# Altium PCB OPAMP_TESTERh.PcbDoc (part 1 of 2)
Units mm, origin at the board's own origin, x right, y up, seen from the top; angles counter-clockwise.
Board outline 262.64 x 156.72 mm, 2 copper layers (Top Layer, Bottom Layer); 210 components, 0 nets, 1610 pads, 0 vias.
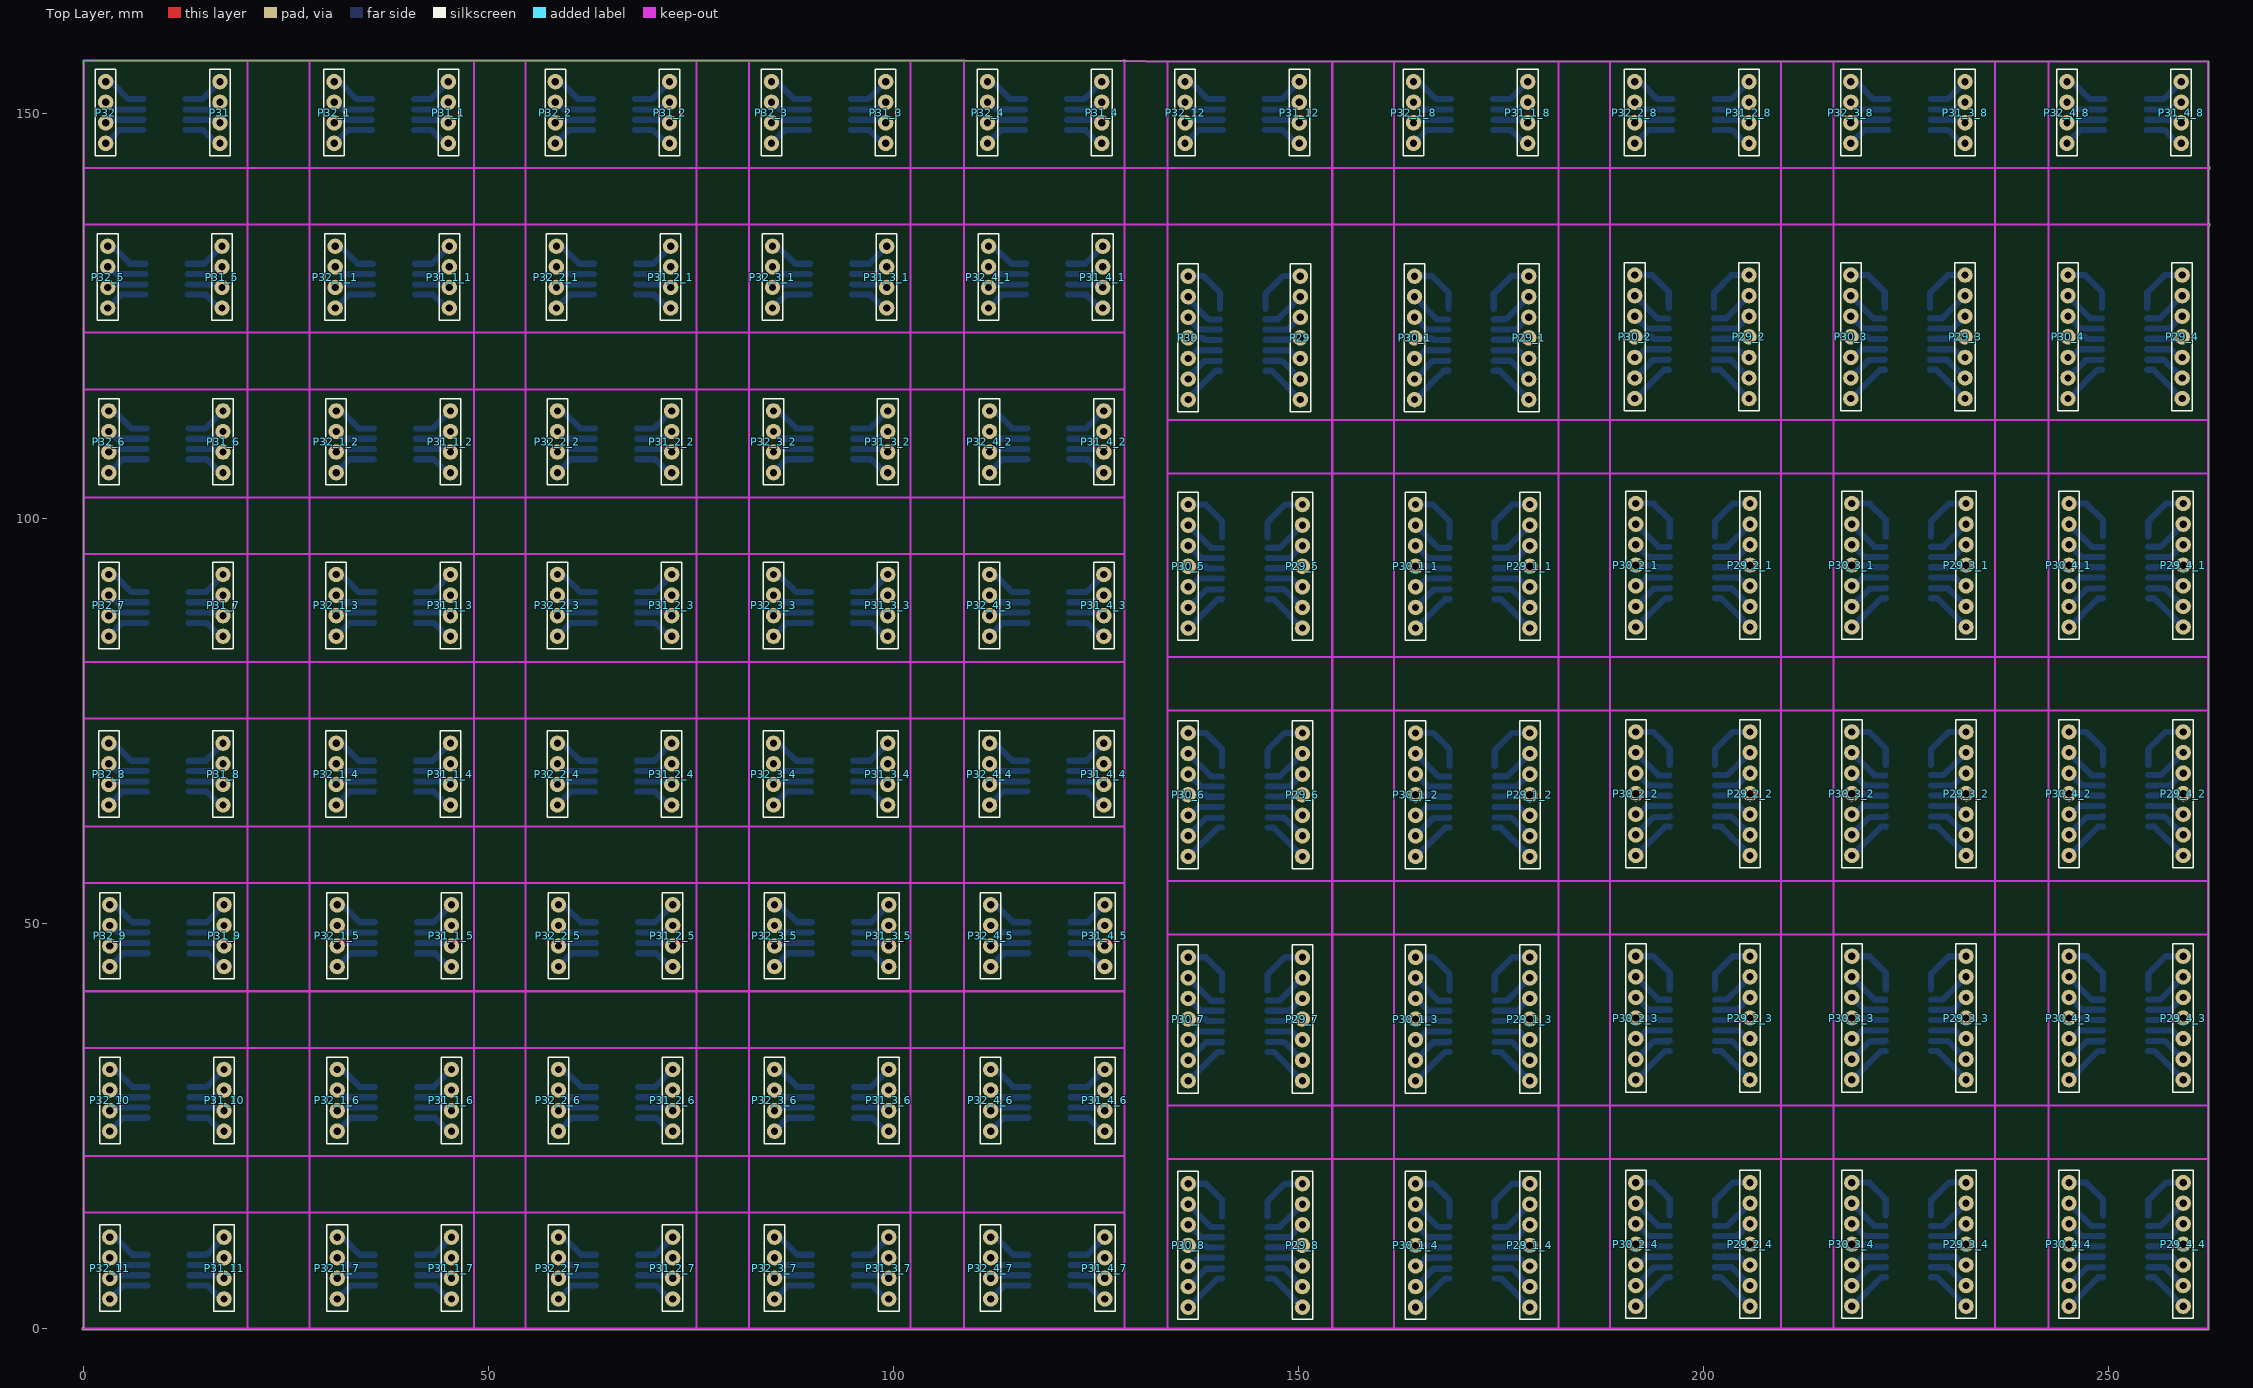
[diagram p0: Top Layer view]
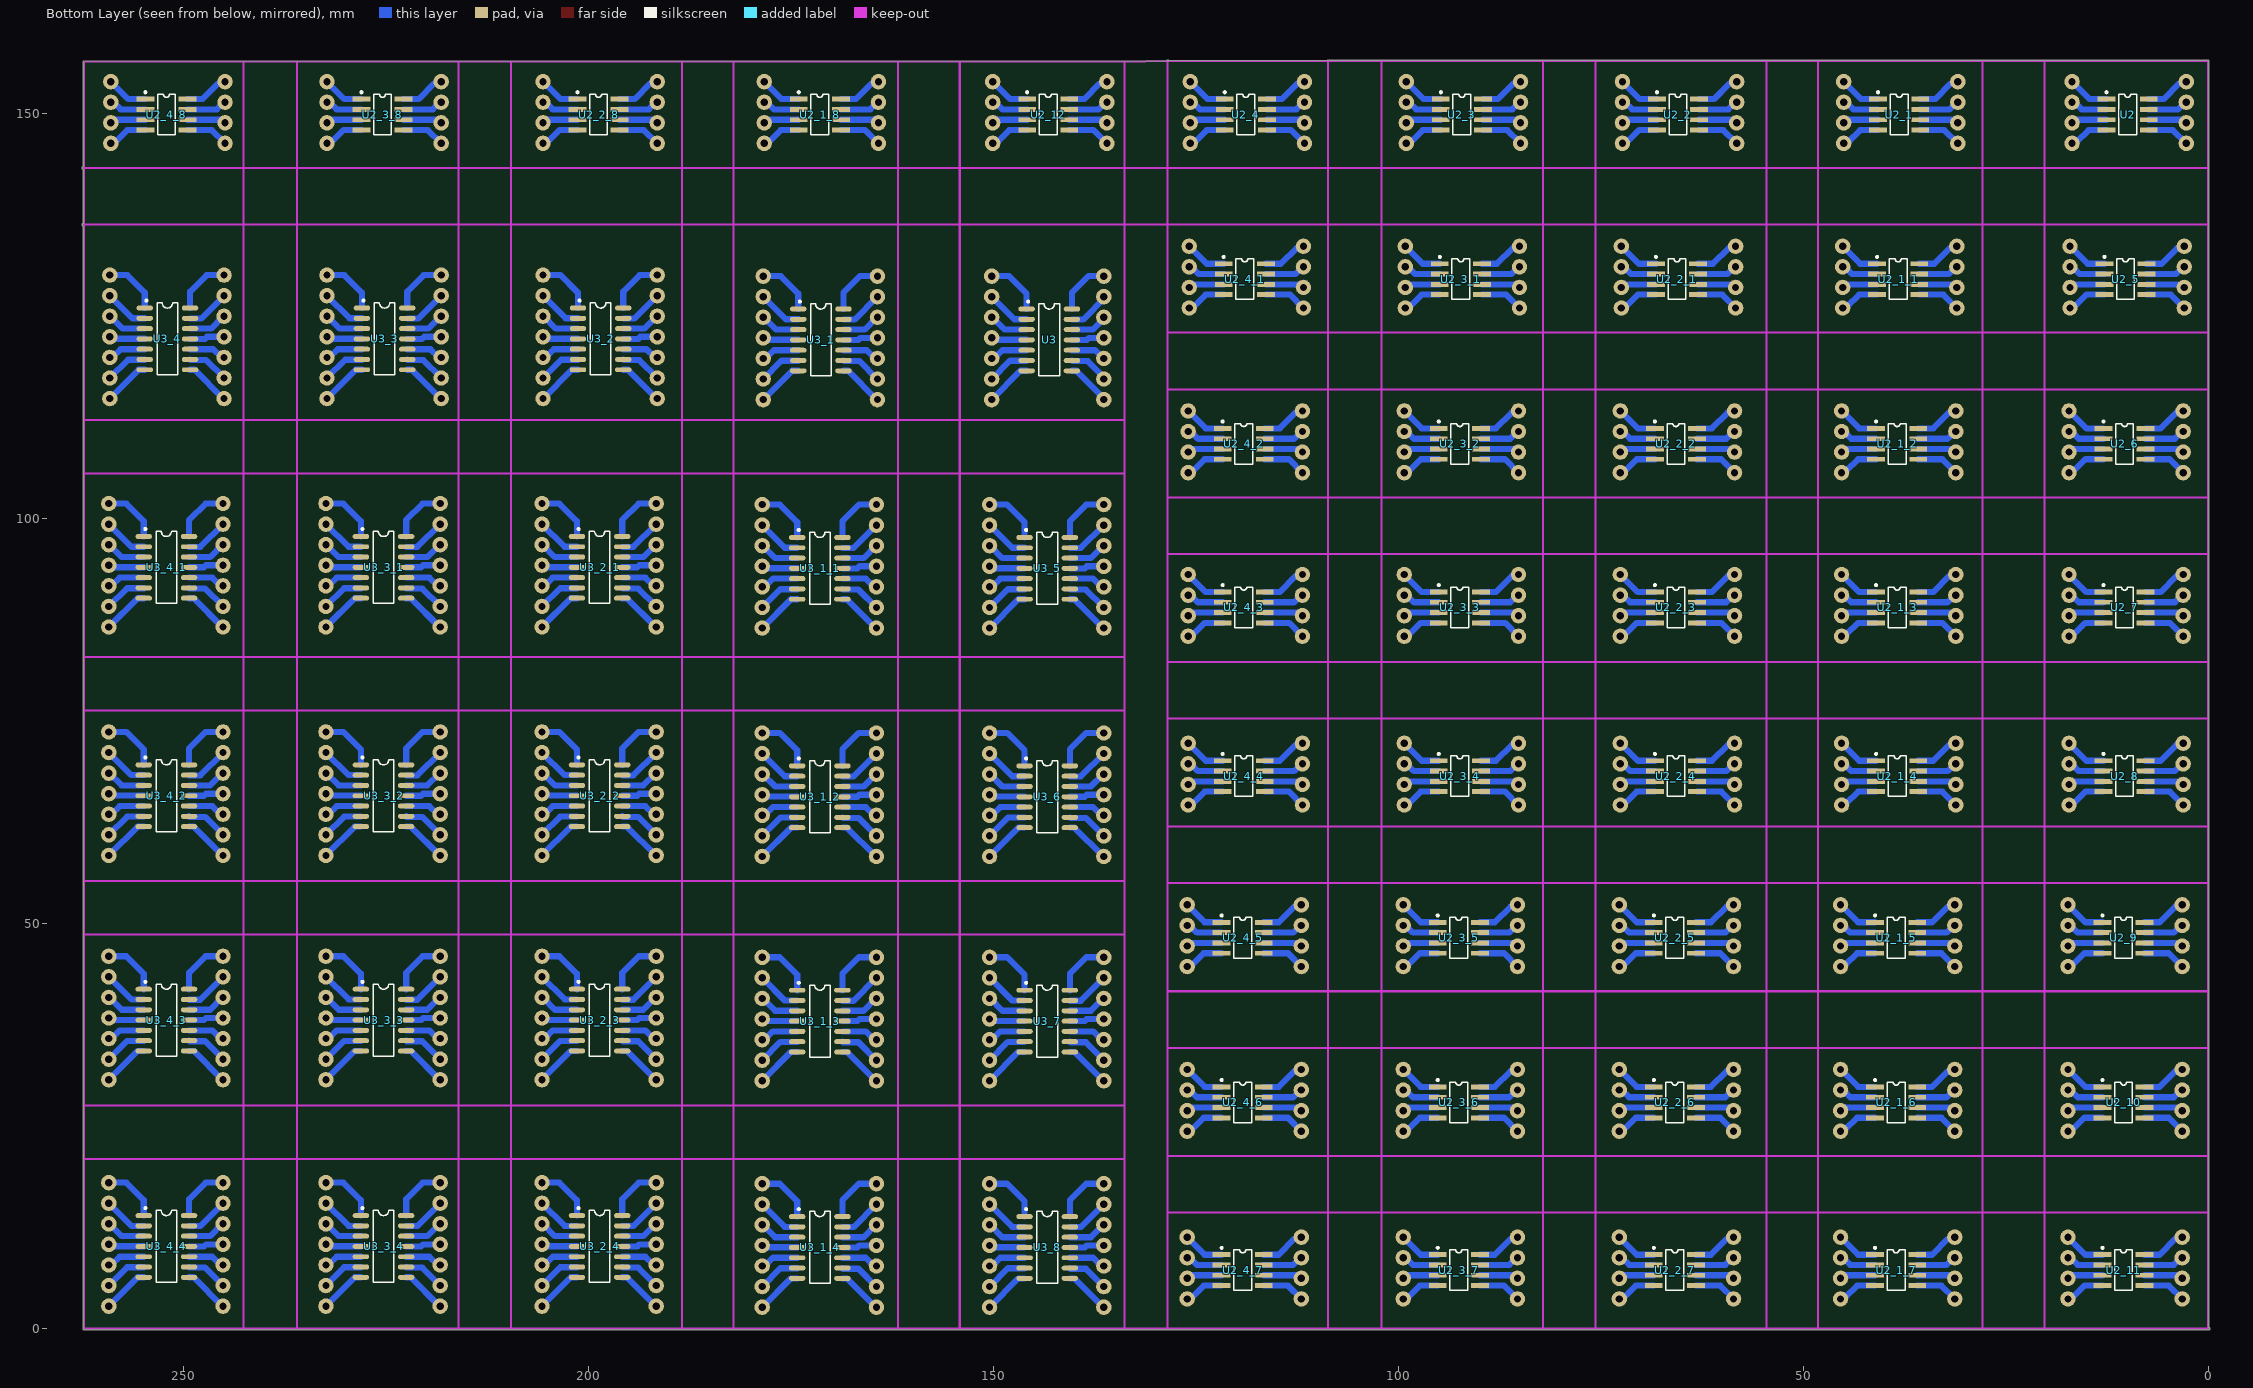
[diagram p1: Bottom Layer view, seen from below]

## Layer stack, top to bottom
Top Solder: solder mask 0.0102, Solder Resist, Dk 3.5
Top Layer: signal copper 0.0356
Dielectric 1: dielectric 0.32, FR-4, Dk 4.8
Bottom Layer: signal copper 0.0356
Bottom Solder: solder mask 0.0102, Solder Resist, Dk 3.5

## Board outline
0,0.127 ccw(c0,0) 0,-0.127 262.255,-0.127 ccw(c262.255,0) 262.382,0 262.382,136.144 ccw(c262.382,136.271) 262.509,136.271 ccw(c262.382,136.271) 262.382,136.398 262.382,143.129 ccw(c262.382,143.256) 262.509,143.256 ccw(c262.382,143.256) 262.382,143.383 262.382,156.337 ccw(c262.255,156.337) 262.255,156.464 128.634,156.529 ccw(c128.524,156.464) 128.414,156.529 108.815,156.539 ccw(c108.712,156.464) 108.609,156.539 102.209,156.542 ccw(c102.108,156.464) 102.007,156.542 82.262,156.551 ccw(c82.169,156.464) 82.076,156.552 75.782,156.555 ccw(c75.692,156.464) 75.603,156.555 54.688,156.565 ccw(c54.61,156.464) 54.532,156.565 48.334,156.568 ccw(c48.26,156.464) 48.186,156.568 27.997,156.578 27.883,156.578 20.369,156.582 20.271,156.582 0.128,156.591 ccw(c0.127,156.464) 0,156.464

## Design rules (kind name [scope] priority, off if disabled: settings)
Clearance [All] p1: gap=0.254 ignorepadtopadclearanceinfootprint=FALSE except(0: Arc-Hole Track-Hole SMDPad-Hole THPad-Hole Via-Hole Fill-Hole Poly-Hole Region-Hole Text-Hole)
PolygonConnect [All] p1: connectstyle=Relief reliefconductorwidth=0.254 reliefentries=4 polygonreliefangle="90 Angle" airgapwidth=0.254
RoutingVias [All] p1: holewidth=0.711 width=1.27 viastyle="Through Hole" minholewidth=0.711 minwidth=1.27 maxholewidth=0.711 maxwidth=1.27
SolderMaskExpansion [All] p1: expansion=0.102 istentingtop=FALSE
Width [All] p1: maxlimit=0.254 minlimit=0.254 preferedwidth=0.254
30 further rules are at their usual default settings.

## Components (designator, comment, footprint, x,y, rotation, side; value= is the part's Value field where it differs from the comment)
P29 "LM324" "CON HDR 2.54FM 7" 150.241,129.921 r270 top locked
P29_1 "LM324" "CON HDR 2.54FM 7" 178.435,129.921 r270 top locked (schematic designator P29)
P29_1_1 "LM324" "CON HDR 2.54FM 7" 178.562,101.727 r270 top locked (schematic designator P29)
P29_1_2 "LM324" "CON HDR 2.54FM 7" 178.562,73.533 r270 top locked (schematic designator P29)
P29_1_3 "LM324" "CON HDR 2.54FM 7" 178.562,45.847 r270 top locked (schematic designator P29)
P29_1_4 "LM324" "CON HDR 2.54FM 7" 178.562,17.907 r270 top locked (schematic designator P29)
P29_2 "LM324" "CON HDR 2.54FM 7" 205.613,130.048 r270 top locked (schematic designator P29)
P29_2_1 "LM324" "CON HDR 2.54FM 7" 205.74,101.854 r270 top locked (schematic designator P29)
P29_2_2 "LM324" "CON HDR 2.54FM 7" 205.74,73.66 r270 top locked (schematic designator P29)
P29_2_3 "LM324" "CON HDR 2.54FM 7" 205.74,45.974 r270 top locked (schematic designator P29)
P29_2_4 "LM324" "CON HDR 2.54FM 7" 205.74,18.034 r270 top locked (schematic designator P29)
P29_3 "LM324" "CON HDR 2.54FM 7" 232.283,130.048 r270 top locked (schematic designator P29)
P29_3_1 "LM324" "CON HDR 2.54FM 7" 232.41,101.854 r270 top locked (schematic designator P29)
P29_3_2 "LM324" "CON HDR 2.54FM 7" 232.41,73.66 r270 top locked (schematic designator P29)
P29_3_3 "LM324" "CON HDR 2.54FM 7" 232.41,45.974 r270 top locked (schematic designator P29)
P29_3_4 "LM324" "CON HDR 2.54FM 7" 232.41,18.034 r270 top locked (schematic designator P29)
P29_4 "LM324" "CON HDR 2.54FM 7" 259.08,130.048 r270 top locked (schematic designator P29)
P29_4_1 "LM324" "CON HDR 2.54FM 7" 259.207,101.854 r270 top locked (schematic designator P29)
P29_4_2 "LM324" "CON HDR 2.54FM 7" 259.207,73.66 r270 top locked (schematic designator P29)
P29_4_3 "LM324" "CON HDR 2.54FM 7" 259.207,45.974 r270 top locked (schematic designator P29)
P29_4_4 "LM324" "CON HDR 2.54FM 7" 259.207,18.034 r270 top locked (schematic designator P29)
P29_5 "LM324" "CON HDR 2.54FM 7" 150.495,101.727 r270 top locked (schematic designator P29)
P29_6 "LM324" "CON HDR 2.54FM 7" 150.495,73.533 r270 top locked (schematic designator P29)
P29_7 "LM324" "CON HDR 2.54FM 7" 150.495,45.847 r270 top locked (schematic designator P29)
P29_8 "LM324" "CON HDR 2.54FM 7" 150.495,17.907 r270 top locked (schematic designator P29)
P30 "LM324" "CON HDR 2.54FM 7" 136.398,114.681 r90 top locked
P30_1 "LM324" "CON HDR 2.54FM 7" 164.338,114.681 r90 top locked (schematic designator P30)
P30_1_1 "LM324" "CON HDR 2.54FM 7" 164.465,86.487 r90 top locked (schematic designator P30)
P30_1_2 "LM324" "CON HDR 2.54FM 7" 164.465,58.293 r90 top locked (schematic designator P30)
P30_1_3 "LM324" "CON HDR 2.54FM 7" 164.465,30.607 r90 top locked (schematic designator P30)
P30_1_4 "LM324" "CON HDR 2.54FM 7" 164.465,2.667 r90 top locked (schematic designator P30)
P30_2 "LM324" "CON HDR 2.54FM 7" 191.516,114.808 r90 top locked (schematic designator P30)
P30_2_1 "LM324" "CON HDR 2.54FM 7" 191.643,86.614 r90 top locked (schematic designator P30)
P30_2_2 "LM324" "CON HDR 2.54FM 7" 191.643,58.42 r90 top locked (schematic designator P30)
P30_2_3 "LM324" "CON HDR 2.54FM 7" 191.643,30.734 r90 top locked (schematic designator P30)
P30_2_4 "LM324" "CON HDR 2.54FM 7" 191.643,2.794 r90 top locked (schematic designator P30)
P30_3 "LM324" "CON HDR 2.54FM 7" 218.186,114.808 r90 top locked (schematic designator P30)
P30_3_1 "LM324" "CON HDR 2.54FM 7" 218.313,86.614 r90 top locked (schematic designator P30)
P30_3_2 "LM324" "CON HDR 2.54FM 7" 218.313,58.42 r90 top locked (schematic designator P30)
P30_3_3 "LM324" "CON HDR 2.54FM 7" 218.313,30.734 r90 top locked (schematic designator P30)
P30_3_4 "LM324" "CON HDR 2.54FM 7" 218.313,2.794 r90 top locked (schematic designator P30)
P30_4 "LM324" "CON HDR 2.54FM 7" 244.983,114.808 r90 top locked (schematic designator P30)
P30_4_1 "LM324" "CON HDR 2.54FM 7" 245.11,86.614 r90 top locked (schematic designator P30)
P30_4_2 "LM324" "CON HDR 2.54FM 7" 245.11,58.42 r90 top locked (schematic designator P30)
P30_4_3 "LM324" "CON HDR 2.54FM 7" 245.11,30.734 r90 top locked (schematic designator P30)
P30_4_4 "LM324" "CON HDR 2.54FM 7" 245.11,2.794 r90 top locked (schematic designator P30)
P30_5 "LM324" "CON HDR 2.54FM 7" 136.398,86.487 r90 top locked (schematic designator P30)
P30_6 "LM324" "CON HDR 2.54FM 7" 136.398,58.293 r90 top locked (schematic designator P30)
P30_7 "LM324" "CON HDR 2.54FM 7" 136.398,30.607 r90 top locked (schematic designator P30)
P30_8 "LM324" "CON HDR 2.54FM 7" 136.398,2.667 r90 top locked (schematic designator P30)
P31 "LM358" "CON HDR 2.54FM 4" 16.891,153.924 r270 top locked
P31_1 "LM358" "CON HDR 2.54FM 4" 45.085,153.924 r270 top locked (schematic designator P31)
P31_1_1 "LM358" "CON HDR 2.54FM 4" 45.212,133.604 r270 top locked (schematic designator P31)
P31_1_2 "LM358" "CON HDR 2.54FM 4" 45.339,113.284 r270 top locked (schematic designator P31)
P31_1_3 "LM358" "CON HDR 2.54FM 4" 45.339,93.091 r270 top locked (schematic designator P31)
P31_1_4 "LM358" "CON HDR 2.54FM 4" 45.339,72.263 r270 top locked (schematic designator P31)
P31_1_5 "LM358" "CON HDR 2.54FM 4" 45.466,52.324 r270 top locked (schematic designator P31)
P31_1_6 "LM358" "CON HDR 2.54FM 4" 45.466,32.004 r270 top locked (schematic designator P31)
P31_1_7 "LM358" "CON HDR 2.54FM 4" 45.466,11.303 r270 top locked (schematic designator P31)
P31_1_8 "LM358" "CON HDR 2.54FM 4" 178.308,153.924 r270 top locked (schematic designator P31)
P31_2 "LM358" "CON HDR 2.54FM 4" 72.39,153.924 r270 top locked (schematic designator P31)
P31_2_1 "LM358" "CON HDR 2.54FM 4" 72.517,133.604 r270 top locked (schematic designator P31)
P31_2_2 "LM358" "CON HDR 2.54FM 4" 72.644,113.284 r270 top locked (schematic designator P31)
P31_2_3 "LM358" "CON HDR 2.54FM 4" 72.644,93.091 r270 top locked (schematic designator P31)
P31_2_4 "LM358" "CON HDR 2.54FM 4" 72.644,72.263 r270 top locked (schematic designator P31)
P31_2_5 "LM358" "CON HDR 2.54FM 4" 72.771,52.324 r270 top locked (schematic designator P31)
P31_2_6 "LM358" "CON HDR 2.54FM 4" 72.771,32.004 r270 top locked (schematic designator P31)
P31_2_7 "LM358" "CON HDR 2.54FM 4" 72.771,11.303 r270 top locked (schematic designator P31)
P31_2_8 "LM358" "CON HDR 2.54FM 4" 205.613,153.924 r270 top locked (schematic designator P31)
P31_3 "LM358" "CON HDR 2.54FM 4" 99.06,153.924 r270 top locked (schematic designator P31)
P31_3_1 "LM358" "CON HDR 2.54FM 4" 99.187,133.604 r270 top locked (schematic designator P31)
P31_3_2 "LM358" "CON HDR 2.54FM 4" 99.314,113.284 r270 top locked (schematic designator P31)
P31_3_3 "LM358" "CON HDR 2.54FM 4" 99.314,93.091 r270 top locked (schematic designator P31)
P31_3_4 "LM358" "CON HDR 2.54FM 4" 99.314,72.263 r270 top locked (schematic designator P31)
P31_3_5 "LM358" "CON HDR 2.54FM 4" 99.441,52.324 r270 top locked (schematic designator P31)
P31_3_6 "LM358" "CON HDR 2.54FM 4" 99.441,32.004 r270 top locked (schematic designator P31)
P31_3_7 "LM358" "CON HDR 2.54FM 4" 99.441,11.303 r270 top locked (schematic designator P31)
P31_3_8 "LM358" "CON HDR 2.54FM 4" 232.283,153.924 r270 top locked (schematic designator P31)
P31_4 "LM358" "CON HDR 2.54FM 4" 125.73,153.924 r270 top locked (schematic designator P31)
P31_4_1 "LM358" "CON HDR 2.54FM 4" 125.857,133.604 r270 top locked (schematic designator P31)
P31_4_2 "LM358" "CON HDR 2.54FM 4" 125.984,113.284 r270 top locked (schematic designator P31)
P31_4_3 "LM358" "CON HDR 2.54FM 4" 125.984,93.091 r270 top locked (schematic designator P31)
P31_4_4 "LM358" "CON HDR 2.54FM 4" 125.984,72.263 r270 top locked (schematic designator P31)
P31_4_5 "LM358" "CON HDR 2.54FM 4" 126.111,52.324 r270 top locked (schematic designator P31)
P31_4_6 "LM358" "CON HDR 2.54FM 4" 126.111,32.004 r270 top locked (schematic designator P31)
P31_4_7 "LM358" "CON HDR 2.54FM 4" 126.111,11.303 r270 top locked (schematic designator P31)
P31_4_8 "LM358" "CON HDR 2.54FM 4" 258.953,153.924 r270 top locked (schematic designator P31)
P31_5 "LM358" "CON HDR 2.54FM 4" 17.145,133.604 r270 top locked (schematic designator P31)
P31_6 "LM358" "CON HDR 2.54FM 4" 17.272,113.284 r270 top locked (schematic designator P31)
P31_7 "LM358" "CON HDR 2.54FM 4" 17.272,93.091 r270 top locked (schematic designator P31)
P31_8 "LM358" "CON HDR 2.54FM 4" 17.272,72.263 r270 top locked (schematic designator P31)
P31_9 "LM358" "CON HDR 2.54FM 4" 17.399,52.324 r270 top locked (schematic designator P31)
P31_10 "LM358" "CON HDR 2.54FM 4" 17.399,32.004 r270 top locked (schematic designator P31)
P31_11 "LM358" "CON HDR 2.54FM 4" 17.399,11.303 r270 top locked (schematic designator P31)
P31_12 "LM358" "CON HDR 2.54FM 4" 150.114,153.924 r270 top locked (schematic designator P31)
P32 "LM358" "CON HDR 2.54FM 4" 2.794,146.304 r90 top locked
P32_1 "LM358" "CON HDR 2.54FM 4" 30.988,146.304 r90 top locked (schematic designator P32)
P32_1_1 "LM358" "CON HDR 2.54FM 4" 31.115,125.984 r90 top locked (schematic designator P32)
P32_1_2 "LM358" "CON HDR 2.54FM 4" 31.242,105.664 r90 top locked (schematic designator P32)
P32_1_3 "LM358" "CON HDR 2.54FM 4" 31.242,85.471 r90 top locked (schematic designator P32)
P32_1_4 "LM358" "CON HDR 2.54FM 4" 31.242,64.643 r90 top locked (schematic designator P32)
P32_1_5 "LM358" "CON HDR 2.54FM 4" 31.369,44.704 r90 top locked (schematic designator P32)
P32_1_6 "LM358" "CON HDR 2.54FM 4" 31.369,24.384 r90 top locked (schematic designator P32)
P32_1_7 "LM358" "CON HDR 2.54FM 4" 31.369,3.683 r90 top locked (schematic designator P32)
P32_1_8 "LM358" "CON HDR 2.54FM 4" 164.211,146.304 r90 top locked (schematic designator P32)
P32_2 "LM358" "CON HDR 2.54FM 4" 58.293,146.304 r90 top locked (schematic designator P32)
P32_2_1 "LM358" "CON HDR 2.54FM 4" 58.42,125.984 r90 top locked (schematic designator P32)
P32_2_2 "LM358" "CON HDR 2.54FM 4" 58.547,105.664 r90 top locked (schematic designator P32)
P32_2_3 "LM358" "CON HDR 2.54FM 4" 58.547,85.471 r90 top locked (schematic designator P32)
P32_2_4 "LM358" "CON HDR 2.54FM 4" 58.547,64.643 r90 top locked (schematic designator P32)
P32_2_5 "LM358" "CON HDR 2.54FM 4" 58.674,44.704 r90 top locked (schematic designator P32)
P32_2_6 "LM358" "CON HDR 2.54FM 4" 58.674,24.384 r90 top locked (schematic designator P32)
P32_2_7 "LM358" "CON HDR 2.54FM 4" 58.674,3.683 r90 top locked (schematic designator P32)
P32_2_8 "LM358" "CON HDR 2.54FM 4" 191.516,146.304 r90 top locked (schematic designator P32)
P32_3 "LM358" "CON HDR 2.54FM 4" 84.963,146.304 r90 top locked (schematic designator P32)
P32_3_1 "LM358" "CON HDR 2.54FM 4" 85.09,125.984 r90 top locked (schematic designator P32)
P32_3_2 "LM358" "CON HDR 2.54FM 4" 85.217,105.664 r90 top locked (schematic designator P32)
P32_3_3 "LM358" "CON HDR 2.54FM 4" 85.217,85.471 r90 top locked (schematic designator P32)
P32_3_4 "LM358" "CON HDR 2.54FM 4" 85.217,64.643 r90 top locked (schematic designator P32)
P32_3_5 "LM358" "CON HDR 2.54FM 4" 85.344,44.704 r90 top locked (schematic designator P32)
P32_3_6 "LM358" "CON HDR 2.54FM 4" 85.344,24.384 r90 top locked (schematic designator P32)
P32_3_7 "LM358" "CON HDR 2.54FM 4" 85.344,3.683 r90 top locked (schematic designator P32)
P32_3_8 "LM358" "CON HDR 2.54FM 4" 218.186,146.304 r90 top locked (schematic designator P32)
P32_4 "LM358" "CON HDR 2.54FM 4" 111.633,146.304 r90 top locked (schematic designator P32)
P32_4_1 "LM358" "CON HDR 2.54FM 4" 111.76,125.984 r90 top locked (schematic designator P32)
P32_4_2 "LM358" "CON HDR 2.54FM 4" 111.887,105.664 r90 top locked (schematic designator P32)
P32_4_3 "LM358" "CON HDR 2.54FM 4" 111.887,85.471 r90 top locked (schematic designator P32)
P32_4_4 "LM358" "CON HDR 2.54FM 4" 111.887,64.643 r90 top locked (schematic designator P32)
P32_4_5 "LM358" "CON HDR 2.54FM 4" 112.014,44.704 r90 top locked (schematic designator P32)
P32_4_6 "LM358" "CON HDR 2.54FM 4" 112.014,24.384 r90 top locked (schematic designator P32)
P32_4_7 "LM358" "CON HDR 2.54FM 4" 112.014,3.683 r90 top locked (schematic designator P32)
P32_4_8 "LM358" "CON HDR 2.54FM 4" 244.856,146.304 r90 top locked (schematic designator P32)
P32_5 "LM358" "CON HDR 2.54FM 4" 3.048,125.984 r90 top locked (schematic designator P32)
P32_6 "LM358" "CON HDR 2.54FM 4" 3.175,105.664 r90 top locked (schematic designator P32)
P32_7 "LM358" "CON HDR 2.54FM 4" 3.175,85.471 r90 top locked (schematic designator P32)
P32_8 "LM358" "CON HDR 2.54FM 4" 3.175,64.643 r90 top locked (schematic designator P32)
P32_9 "LM358" "CON HDR 2.54FM 4" 3.302,44.704 r90 top locked (schematic designator P32)
P32_10 "LM358" "CON HDR 2.54FM 4" 3.302,24.384 r90 top locked (schematic designator P32)
P32_11 "LM358" "CON HDR 2.54FM 4" 3.302,3.683 r90 top locked (schematic designator P32)
P32_12 "LM358" "CON HDR 2.54FM 4" 136.017,146.304 r90 top locked (schematic designator P32)
U2 "IC LM358" "SMD IC SOP8" 10.033,149.86 r270 bottom locked
U2_1 "IC LM358" "SMD IC SOP8" 38.227,149.86 r270 bottom locked (schematic designator U2)
U2_1_1 "IC LM358" "SMD IC SOP8" 38.354,129.54 r270 bottom locked (schematic designator U2)
U2_1_2 "IC LM358" "SMD IC SOP8" 38.481,109.22 r270 bottom locked (schematic designator U2)
U2_1_3 "IC LM358" "SMD IC SOP8" 38.481,89.027 r270 bottom locked (schematic designator U2)
U2_1_4 "IC LM358" "SMD IC SOP8" 38.481,68.199 r270 bottom locked (schematic designator U2)
U2_1_5 "IC LM358" "SMD IC SOP8" 38.608,48.26 r270 bottom locked (schematic designator U2)
U2_1_6 "IC LM358" "SMD IC SOP8" 38.608,27.94 r270 bottom locked (schematic designator U2)
U2_1_7 "IC LM358" "SMD IC SOP8" 38.608,7.239 r270 bottom locked (schematic designator U2)
U2_1_8 "IC LM358" "SMD IC SOP8" 171.45,149.86 r270 bottom locked (schematic designator U2)
U2_2 "IC LM358" "SMD IC SOP8" 65.532,149.86 r270 bottom locked (schematic designator U2)
U2_2_1 "IC LM358" "SMD IC SOP8" 65.659,129.54 r270 bottom locked (schematic designator U2)
U2_2_2 "IC LM358" "SMD IC SOP8" 65.786,109.22 r270 bottom locked (schematic designator U2)
U2_2_3 "IC LM358" "SMD IC SOP8" 65.786,89.027 r270 bottom locked (schematic designator U2)
U2_2_4 "IC LM358" "SMD IC SOP8" 65.786,68.199 r270 bottom locked (schematic designator U2)
U2_2_5 "IC LM358" "SMD IC SOP8" 65.913,48.26 r270 bottom locked (schematic designator U2)
U2_2_6 "IC LM358" "SMD IC SOP8" 65.913,27.94 r270 bottom locked (schematic designator U2)
U2_2_7 "IC LM358" "SMD IC SOP8" 65.913,7.239 r270 bottom locked (schematic designator U2)
U2_2_8 "IC LM358" "SMD IC SOP8" 198.755,149.86 r270 bottom locked (schematic designator U2)
U2_3 "IC LM358" "SMD IC SOP8" 92.202,149.86 r270 bottom locked (schematic designator U2)
U2_3_1 "IC LM358" "SMD IC SOP8" 92.329,129.54 r270 bottom locked (schematic designator U2)
U2_3_2 "IC LM358" "SMD IC SOP8" 92.456,109.22 r270 bottom locked (schematic designator U2)
U2_3_3 "IC LM358" "SMD IC SOP8" 92.456,89.027 r270 bottom locked (schematic designator U2)
U2_3_4 "IC LM358" "SMD IC SOP8" 92.456,68.199 r270 bottom locked (schematic designator U2)
U2_3_5 "IC LM358" "SMD IC SOP8" 92.583,48.26 r270 bottom locked (schematic designator U2)
U2_3_6 "IC LM358" "SMD IC SOP8" 92.583,27.94 r270 bottom locked (schematic designator U2)
U2_3_7 "IC LM358" "SMD IC SOP8" 92.583,7.239 r270 bottom locked (schematic designator U2)
U2_3_8 "IC LM358" "SMD IC SOP8" 225.425,149.86 r270 bottom locked (schematic designator U2)
U2_4 "IC LM358" "SMD IC SOP8" 118.872,149.86 r270 bottom locked (schematic designator U2)
U2_4_1 "IC LM358" "SMD IC SOP8" 118.999,129.54 r270 bottom locked (schematic designator U2)
U2_4_2 "IC LM358" "SMD IC SOP8" 119.126,109.22 r270 bottom locked (schematic designator U2)
U2_4_3 "IC LM358" "SMD IC SOP8" 119.126,89.027 r270 bottom locked (schematic designator U2)
U2_4_4 "IC LM358" "SMD IC SOP8" 119.126,68.199 r270 bottom locked (schematic designator U2)
U2_4_5 "IC LM358" "SMD IC SOP8" 119.253,48.26 r270 bottom locked (schematic designator U2)
U2_4_6 "IC LM358" "SMD IC SOP8" 119.253,27.94 r270 bottom locked (schematic designator U2)
U2_4_7 "IC LM358" "SMD IC SOP8" 119.253,7.239 r270 bottom locked (schematic designator U2)
U2_4_8 "IC LM358" "SMD IC SOP8" 252.095,149.86 r270 bottom locked (schematic designator U2)
U2_5 "IC LM358" "SMD IC SOP8" 10.287,129.54 r270 bottom locked (schematic designator U2)
U2_6 "IC LM358" "SMD IC SOP8" 10.414,109.22 r270 bottom locked (schematic designator U2)
U2_7 "IC LM358" "SMD IC SOP8" 10.414,89.027 r270 bottom locked (schematic designator U2)
U2_8 "IC LM358" "SMD IC SOP8" 10.414,68.199 r270 bottom locked (schematic designator U2)
U2_9 "IC LM358" "SMD IC SOP8" 10.541,48.26 r270 bottom locked (schematic designator U2)
U2_10 "IC LM358" "SMD IC SOP8" 10.541,27.94 r270 bottom locked (schematic designator U2)
U2_11 "IC LM358" "SMD IC SOP8" 10.541,7.239 r270 bottom locked (schematic designator U2)
U2_12 "IC LM358" "SMD IC SOP8" 143.256,149.86 r270 bottom locked (schematic designator U2)
U3 "IC LM324" "SMD IC SOP14" 143.129,122.047 r270 bottom locked
U3_1 "IC LM324" "SMD IC SOP14" 171.323,122.047 r270 bottom locked (schematic designator U3)
U3_1_1 "IC LM324" "SMD IC SOP14" 171.45,93.853 r270 bottom locked (schematic designator U3)
U3_1_2 "IC LM324" "SMD IC SOP14" 171.45,65.659 r270 bottom locked (schematic designator U3)
U3_1_3 "IC LM324" "SMD IC SOP14" 171.45,37.973 r270 bottom locked (schematic designator U3)
U3_1_4 "IC LM324" "SMD IC SOP14" 171.45,10.033 r270 bottom locked (schematic designator U3)
U3_2 "IC LM324" "SMD IC SOP14" 198.501,122.174 r270 bottom locked (schematic designator U3)
U3_2_1 "IC LM324" "SMD IC SOP14" 198.628,93.98 r270 bottom locked (schematic designator U3)
U3_2_2 "IC LM324" "SMD IC SOP14" 198.628,65.786 r270 bottom locked (schematic designator U3)
U3_2_3 "IC LM324" "SMD IC SOP14" 198.628,38.1 r270 bottom locked (schematic designator U3)
U3_2_4 "IC LM324" "SMD IC SOP14" 198.628,10.16 r270 bottom locked (schematic designator U3)
U3_3 "IC LM324" "SMD IC SOP14" 225.171,122.174 r270 bottom locked (schematic designator U3)
U3_3_1 "IC LM324" "SMD IC SOP14" 225.298,93.98 r270 bottom locked (schematic designator U3)
U3_3_2 "IC LM324" "SMD IC SOP14" 225.298,65.786 r270 bottom locked (schematic designator U3)
U3_3_3 "IC LM324" "SMD IC SOP14" 225.298,38.1 r270 bottom locked (schematic designator U3)
U3_3_4 "IC LM324" "SMD IC SOP14" 225.298,10.16 r270 bottom locked (schematic designator U3)
U3_4 "IC LM324" "SMD IC SOP14" 251.968,122.174 r270 bottom locked (schematic designator U3)
U3_4_1 "IC LM324" "SMD IC SOP14" 252.095,93.98 r270 bottom locked (schematic designator U3)
U3_4_2 "IC LM324" "SMD IC SOP14" 252.095,65.786 r270 bottom locked (schematic designator U3)
U3_4_3 "IC LM324" "SMD IC SOP14" 252.095,38.1 r270 bottom locked (schematic designator U3)
U3_4_4 "IC LM324" "SMD IC SOP14" 252.095,10.16 r270 bottom locked (schematic designator U3)
U3_5 "IC LM324" "SMD IC SOP14" 143.383,93.853 r270 bottom locked (schematic designator U3)
U3_6 "IC LM324" "SMD IC SOP14" 143.383,65.659 r270 bottom locked (schematic designator U3)
U3_7 "IC LM324" "SMD IC SOP14" 143.383,37.973 r270 bottom locked (schematic designator U3)
U3_8 "IC LM324" "SMD IC SOP14" 143.383,10.033 r270 bottom locked (schematic designator U3)

## Footprints (in the part's own frame and the unit in brackets; to place one, negate y for a bottom-side part, rotate by r counter-clockwise, add the part's x,y. Pads: shape width x height; smd on the part's side, far side on the other; paste and mask are expansions set on the pad)
"CON HDR 2.54FM 4" [mm] "CONNECTOR PTCH:2.54MM"
  round 1.905 hole 0.9: 1(0,0) 2(2.54,0) 3(5.08,0) 4(7.62,0)
  silkscreen extent -1.52,-1.27 9.14,1.27, body extent -1.5,-1.24 9.16,1.26, height 5
"CON HDR 2.54FM 7" [mm] "CONNECTOR PTCH:2.54MM"
  round 1.905 hole 0.9: 1(0,0) 2(2.54,0) 3(5.08,0) 4(7.62,0) 5(10.16,0) 6(12.7,0) 7(15.24,0)
  silkscreen extent -1.52,-1.27 16.76,1.27, body extent -1.54,-1.24 16.74,1.26, height 5
"SMD IC SOP8" [mm] "SOP, 8-Leads , Pitch 1.27mm"
  rect 0.6x2.2 smd: 1(-1.905,-2.6) 2(-0.635,-2.6) 3(0.635,-2.6) 4(1.905,-2.6) 5(1.905,2.6) 6(0.635,2.6) 7(-0.635,2.6) 8(-1.905,2.6)
  round 1.5 on Mech2: 4(-1.3,0) 4(1.3,0)
  silkscreen extent -2.88,-2.72 2.5,1.1, body extent -2.5,-3.1 2.5,3.1, height 1.75
"SMD IC SOP14" [mil] "SOP, 14-Leads , Pitch 1.27mm"
  oval 24x80 smd: 1(-150,-110) 2(-100,-110) 3(-50,-110) 4(0,-110) 5(50,-110) 6(100,-110) 7(150,-110) 8(150,110) 9(100,110) 10(50,110) 11(0,110) 12(-50,110) 13(-100,110) 14(-150,110)
  round 59.06 on Mech2: 5(-60,0) 5(60,0)
  oval 39.37x78.74 on Mech2: 6(-155,0) 6(155,0)
  silkscreen extent -191,-107 175,50, body extent -171,-121 171,121, height 70

## Part data
P29 P29_1 P29_1_1 P29_1_2 P29_1_3 P29_1_4 P29_2 P29_2_1 P29_2_2 P29_2_3 P29_2_4 P29_3 P29_3_1 P29_3_2 P29_3_3 P29_3_4 P29_4 P29_4_1 P29_4_2 P29_4_3 P29_4_4 P29_5 P29_6 P29_7 P29_8 P30 P30_1 P30_1_1 P30_1_2 P30_1_3 P30_1_4 P30_2 P30_2_1 P30_2_2 P30_2_3 P30_2_4 P30_3 P30_3_1 P30_3_2 P30_3_3 P30_3_4 P30_4 P30_4_1 P30_4_2 P30_4_3 P30_4_4 P30_5 P30_6 P30_7 P30_8: library part "CONNECTOR 7", "Header, 7-Pin", LatestRevisionDate=17-Jul-2002, LatestRevisionNote="Re-released for DXP Platform.", Publisher="Altium Limited"
P31 P31_1 P31_1_1 P31_1_2 P31_1_3 P31_1_4 P31_1_5 P31_1_6 P31_1_7 P31_1_8 P31_2 P31_2_1 P31_2_2 P31_2_3 P31_2_4 P31_2_5 P31_2_6 P31_2_7 P31_2_8 P31_3 P31_3_1 P31_3_2 P31_3_3 P31_3_4 P31_3_5 P31_3_6 P31_3_7 P31_3_8 P31_4 P31_4_1 P31_4_2 P31_4_3 P31_4_4 P31_4_5 P31_4_6 P31_4_7 P31_4_8 P31_5 P31_6 P31_7 P31_8 P31_9 P31_10 P31_11 P31_12 P32 P32_1 P32_1_1 P32_1_2 P32_1_3 P32_1_4 P32_1_5 P32_1_6 P32_1_7 P32_1_8 P32_2 P32_2_1 P32_2_2 P32_2_3 P32_2_4 P32_2_5 P32_2_6 P32_2_7 P32_2_8 P32_3 P32_3_1 P32_3_2 P32_3_3 P32_3_4 P32_3_5 P32_3_6 P32_3_7 P32_3_8 P32_4 P32_4_1 P32_4_2 P32_4_3 P32_4_4 P32_4_5 P32_4_6 P32_4_7 P32_4_8 P32_5 P32_6 P32_7 P32_8 P32_9 P32_10 P32_11 P32_12: library part "CONNECTOR 4", "Header, 4-Pin", LatestRevisionDate=17-Jul-2002, LatestRevisionNote="Re-released for DXP Platform.", Publisher="Altium Limited"

## Nets (pads, with @x,y where several pads share a name; then routed paths per layer and width w, separated by ;. In a path a pad name is that pad's centre, name@x,y a point inside that pad or via, vN(x,y) a via of type N, cw(c..) or ccw(c..) an arc to the next point about the centre after c; other vN are vias at no path point)
pads on no net: P29.1 P29.2 P29.3 P29.4 P29.5 P29.6 P29.7 P29_1.1 P29_1.2 P29_1.3 P29_1.4 P29_1.5 P29_1.6 P29_1.7 P29_1_1.1 P29_1_1.2 P29_1_1.3 P29_1_1.4 P29_1_1.5 P29_1_1.6 P29_1_1.7 P29_1_2.1 P29_1_2.2 P29_1_2.3 P29_1_2.4 P29_1_2.5 P29_1_2.6 P29_1_2.7 P29_1_3.1 P29_1_3.2 P29_1_3.3 P29_1_3.4 P29_1_3.5 P29_1_3.6 P29_1_3.7 P29_1_4.1 P29_1_4.2 P29_1_4.3 P29_1_4.4 P29_1_4.5 P29_1_4.6 P29_1_4.7 P29_2.1 P29_2.2 P29_2.3 P29_2.4 P29_2.5 P29_2.6 P29_2.7 P29_2_1.1 P29_2_1.2 P29_2_1.3 P29_2_1.4 P29_2_1.5 P29_2_1.6 P29_2_1.7 P29_2_2.1 P29_2_2.2 P29_2_2.3 P29_2_2.4 P29_2_2.5 P29_2_2.6 P29_2_2.7 P29_2_3.1 P29_2_3.2 P29_2_3.3 P29_2_3.4 P29_2_3.5 P29_2_3.6 P29_2_3.7 P29_2_4.1 P29_2_4.2 P29_2_4.3 P29_2_4.4 P29_2_4.5 P29_2_4.6 P29_2_4.7 P29_3.1 P29_3.2 P29_3.3 P29_3.4 P29_3.5 P29_3.6 P29_3.7 P29_3_1.1 P29_3_1.2 P29_3_1.3 P29_3_1.4 P29_3_1.5 P29_3_1.6 P29_3_1.7 P29_3_2.1 P29_3_2.2 P29_3_2.3 P29_3_2.4 P29_3_2.5 P29_3_2.6 P29_3_2.7 P29_3_3.1 P29_3_3.2 P29_3_3.3 P29_3_3.4 P29_3_3.5 P29_3_3.6 P29_3_3.7 P29_3_4.1 P29_3_4.2 P29_3_4.3 P29_3_4.4 P29_3_4.5 P29_3_4.6 P29_3_4.7 P29_4.1 P29_4.2 P29_4.3 P29_4.4 P29_4.5 P29_4.6 P29_4.7 P29_4_1.1 P29_4_1.2 P29_4_1.3 P29_4_1.4 P29_4_1.5 P29_4_1.6 P29_4_1.7 P29_4_2.1 P29_4_2.2 P29_4_2.3 P29_4_2.4 P29_4_2.5 P29_4_2.6 P29_4_2.7 P29_4_3.1 P29_4_3.2 P29_4_3.3 P29_4_3.4 P29_4_3.5 P29_4_3.6 P29_4_3.7 P29_4_4.1 P29_4_4.2 P29_4_4.3 P29_4_4.4 P29_4_4.5 P29_4_4.6 P29_4_4.7 P29_5.1 P29_5.2 P29_5.3 P29_5.4 P29_5.5 P29_5.6 P29_5.7 P29_6.1 P29_6.2 P29_6.3 P29_6.4 P29_6.5 P29_6.6 P29_6.7 P29_7.1 P29_7.2 P29_7.3 P29_7.4 P29_7.5 P29_7.6 P29_7.7 P29_8.1 P29_8.2 P29_8.3 P29_8.4 P29_8.5 P29_8.6 P29_8.7 P30.1 P30.2 P30.3 P30.4 P30.5 P30.6 P30.7 P30_1.1 P30_1.2 P30_1.3 P30_1.4 P30_1.5 P30_1.6 P30_1.7 P30_1_1.1 P30_1_1.2 P30_1_1.3 P30_1_1.4 P30_1_1.5 P30_1_1.6 P30_1_1.7 P30_1_2.1 P30_1_2.2 P30_1_2.3 P30_1_2.4 P30_1_2.5 P30_1_2.6 P30_1_2.7 P30_1_3.1 P30_1_3.2 P30_1_3.3 P30_1_3.4 P30_1_3.5 P30_1_3.6 P30_1_3.7 P30_1_4.1 P30_1_4.2 P30_1_4.3 P30_1_4.4 P30_1_4.5 P30_1_4.6 P30_1_4.7 P30_2.1 P30_2.2 P30_2.3 P30_2.4 P30_2.5 P30_2.6 P30_2.7 P30_2_1.1 P30_2_1.2 P30_2_1.3 P30_2_1.4 P30_2_1.5 P30_2_1.6 P30_2_1.7 P30_2_2.1 P30_2_2.2 P30_2_2.3 P30_2_2.4 P30_2_2.5 P30_2_2.6 P30_2_2.7 P30_2_3.1 P30_2_3.2 P30_2_3.3 P30_2_3.4 P30_2_3.5 P30_2_3.6 P30_2_3.7 P30_2_4.1 P30_2_4.2 P30_2_4.3 P30_2_4.4 P30_2_4.5 P30_2_4.6 P30_2_4.7 P30_3.1 P30_3.2 P30_3.3 P30_3.4 P30_3.5 P30_3.6 P30_3.7 P30_3_1.1 P30_3_1.2 P30_3_1.3 P30_3_1.4 P30_3_1.5 P30_3_1.6 P30_3_1.7 P30_3_2.1 P30_3_2.2 P30_3_2.3 P30_3_2.4 P30_3_2.5 P30_3_2.6 P30_3_2.7 P30_3_3.1 P30_3_3.2 P30_3_3.3 P30_3_3.4 P30_3_3.5 P30_3_3.6 P30_3_3.7 P30_3_4.1 P30_3_4.2 P30_3_4.3 P30_3_4.4 P30_3_4.5 P30_3_4.6 P30_3_4.7 P30_4.1 P30_4.2 P30_4.3 P30_4.4 P30_4.5 P30_4.6 P30_4.7 P30_4_1.1 P30_4_1.2 P30_4_1.3 P30_4_1.4 P30_4_1.5 P30_4_1.6 P30_4_1.7 P30_4_2.1 P30_4_2.2 P30_4_2.3 P30_4_2.4 P30_4_2.5 P30_4_2.6 P30_4_2.7 P30_4_3.1 P30_4_3.2 P30_4_3.3 P30_4_3.4 P30_4_3.5 P30_4_3.6 P30_4_3.7 P30_4_4.1 P30_4_4.2 P30_4_4.3 P30_4_4.4 P30_4_4.5 P30_4_4.6 P30_4_4.7 P30_5.1 P30_5.2 P30_5.3 P30_5.4 P30_5.5 P30_5.6 P30_5.7 P30_6.1 P30_6.2 P30_6.3 P30_6.4 P30_6.5 P30_6.6 P30_6.7 P30_7.1 P30_7.2 P30_7.3 P30_7.4 P30_7.5 P30_7.6 P30_7.7 P30_8.1 P30_8.2 P30_8.3 P30_8.4 P30_8.5 P30_8.6 P30_8.7 P31.1 P31.2 P31.3 P31.4 P31_1.1 P31_1.2 P31_1.3 P31_1.4 P31_1_1.1 P31_1_1.2 P31_1_1.3 P31_1_1.4 P31_1_2.1 P31_1_2.2 P31_1_2.3 P31_1_2.4 P31_1_3.1 P31_1_3.2 P31_1_3.3 P31_1_3.4 P31_1_4.1 P31_1_4.2 P31_1_4.3 P31_1_4.4 P31_1_5.1 P31_1_5.2 P31_1_5.3 P31_1_5.4 P31_1_6.1 P31_1_6.2 P31_1_6.3 P31_1_6.4 P31_1_7.1 P31_1_7.2 P31_1_7.3 P31_1_7.4 P31_1_8.1 P31_1_8.2 P31_1_8.3 P31_1_8.4 P31_2.1 P31_2.2 P31_2.3 P31_2.4 P31_2_1.1 P31_2_1.2 P31_2_1.3 P31_2_1.4 P31_2_2.1 P31_2_2.2 P31_2_2.3 P31_2_2.4 P31_2_3.1 P31_2_3.2 P31_2_3.3 P31_2_3.4 P31_2_4.1 P31_2_4.2 P31_2_4.3 P31_2_4.4 P31_2_5.1 P31_2_5.2 P31_2_5.3 P31_2_5.4 P31_2_6.1 P31_2_6.2 P31_2_6.3 P31_2_6.4 P31_2_7.1 P31_2_7.2 P31_2_7.3 P31_2_7.4 P31_2_8.1 P31_2_8.2 P31_2_8.3 P31_2_8.4 P31_3.1 P31_3.2 P31_3.3 P31_3.4 P31_3_1.1 P31_3_1.2 P31_3_1.3 P31_3_1.4 P31_3_2.1 P31_3_2.2 P31_3_2.3 P31_3_2.4 P31_3_3.1 P31_3_3.2 P31_3_3.3 P31_3_3.4 P31_3_4.1 P31_3_4.2 P31_3_4.3 P31_3_4.4 P31_3_5.1 P31_3_5.2 P31_3_5.3 P31_3_5.4 P31_3_6.1 P31_3_6.2 P31_3_6.3 P31_3_6.4 P31_3_7.1 P31_3_7.2 P31_3_7.3 P31_3_7.4 P31_3_8.1 P31_3_8.2 P31_3_8.3 P31_3_8.4 P31_4.1 P31_4.2 P31_4.3 P31_4.4 P31_4_1.1 P31_4_1.2 P31_4_1.3 P31_4_1.4 P31_4_2.1 P31_4_2.2 P31_4_2.3 P31_4_2.4 P31_4_3.1 P31_4_3.2 P31_4_3.3 P31_4_3.4 P31_4_4.1 P31_4_4.2 P31_4_4.3 P31_4_4.4 P31_4_5.1 P31_4_5.2 P31_4_5.3 P31_4_5.4 P31_4_6.1 P31_4_6.2 P31_4_6.3 P31_4_6.4 P31_4_7.1 P31_4_7.2 P31_4_7.3 P31_4_7.4 P31_4_8.1 P31_4_8.2 P31_4_8.3 P31_4_8.4 P31_5.1 P31_5.2 P31_5.3 P31_5.4 P31_6.1 P31_6.2 P31_6.3 P31_6.4 P31_7.1 P31_7.2 P31_7.3 P31_7.4 P31_8.1 P31_8.2 P31_8.3 P31_8.4 P31_9.1 P31_9.2 P31_9.3 P31_9.4 P31_10.1 P31_10.2 P31_10.3 P31_10.4 P31_11.1 P31_11.2 P31_11.3 P31_11.4 P31_12.1 P31_12.2 P31_12.3 P31_12.4 P32.1 P32.2 P32.3 P32.4 P32_1.1 P32_1.2 P32_1.3 P32_1.4 P32_1_1.1 P32_1_1.2 P32_1_1.3 P32_1_1.4 P32_1_2.1 P32_1_2.2 P32_1_2.3 P32_1_2.4 P32_1_3.1 P32_1_3.2 P32_1_3.3 P32_1_3.4 P32_1_4.1 P32_1_4.2 P32_1_4.3 P32_1_4.4 P32_1_5.1 P32_1_5.2 P32_1_5.3 P32_1_5.4 P32_1_6.1 P32_1_6.2 P32_1_6.3 P32_1_6.4 P32_1_7.1 P32_1_7.2 P32_1_7.3 P32_1_7.4 P32_1_8.1 P32_1_8.2 P32_1_8.3 P32_1_8.4 P32_2.1 P32_2.2 P32_2.3 P32_2.4 P32_2_1.1 P32_2_1.2 P32_2_1.3 P32_2_1.4 P32_2_2.1 P32_2_2.2 P32_2_2.3 P32_2_2.4 P32_2_3.1 P32_2_3.2 P32_2_3.3 P32_2_3.4 P32_2_4.1 P32_2_4.2 P32_2_4.3 P32_2_4.4 P32_2_5.1 P32_2_5.2 P32_2_5.3 P32_2_5.4 P32_2_6.1 P32_2_6.2 P32_2_6.3 P32_2_6.4 P32_2_7.1 P32_2_7.2 P32_2_7.3 P32_2_7.4 P32_2_8.1 P32_2_8.2 P32_2_8.3 P32_2_8.4 P32_3.1 P32_3.2 P32_3.3 P32_3.4 P32_3_1.1 P32_3_1.2 P32_3_1.3 P32_3_1.4 P32_3_2.1 P32_3_2.2 P32_3_2.3 P32_3_2.4 P32_3_3.1 P32_3_3.2 P32_3_3.3 P32_3_3.4 P32_3_4.1 P32_3_4.2 P32_3_4.3 P32_3_4.4 P32_3_5.1 P32_3_5.2 P32_3_5.3 P32_3_5.4 P32_3_6.1 P32_3_6.2 P32_3_6.3 P32_3_6.4 P32_3_7.1 P32_3_7.2 P32_3_7.3 P32_3_7.4 P32_3_8.1 P32_3_8.2 P32_3_8.3 P32_3_8.4 P32_4.1 P32_4.2 P32_4.3 P32_4.4 P32_4_1.1 P32_4_1.2 P32_4_1.3 P32_4_1.4 P32_4_2.1 P32_4_2.2 P32_4_2.3 P32_4_2.4 P32_4_3.1 P32_4_3.2 P32_4_3.3 P32_4_3.4 P32_4_4.1 P32_4_4.2 P32_4_4.3 P32_4_4.4 P32_4_5.1 P32_4_5.2 P32_4_5.3 P32_4_5.4 P32_4_6.1 P32_4_6.2 P32_4_6.3 P32_4_6.4 P32_4_7.1 P32_4_7.2 P32_4_7.3 P32_4_7.4 P32_4_8.1 P32_4_8.2 P32_4_8.3 P32_4_8.4 P32_5.1 P32_5.2 P32_5.3 P32_5.4 P32_6.1 P32_6.2 P32_6.3 P32_6.4 P32_7.1 P32_7.2 P32_7.3 P32_7.4 P32_8.1 P32_8.2 P32_8.3 P32_8.4 P32_9.1 P32_9.2 P32_9.3 P32_9.4 P32_10.1 P32_10.2 P32_10.3 P32_10.4 P32_11.1 P32_11.2 P32_11.3 P32_11.4 P32_12.1 P32_12.2 P32_12.3 P32_12.4 U2.1 U2.2 U2.3 U2.4 U2.5 U2.6 U2.7 U2.8 U2_1.1 U2_1.2 U2_1.3 U2_1.4 U2_1.5 U2_1.6 U2_1.7 U2_1.8 U2_1_1.1 U2_1_1.2 U2_1_1.3 U2_1_1.4 U2_1_1.5 U2_1_1.6 U2_1_1.7 U2_1_1.8 U2_1_2.1 U2_1_2.2 U2_1_2.3 U2_1_2.4 U2_1_2.5 U2_1_2.6 U2_1_2.7 U2_1_2.8 U2_1_3.1 U2_1_3.2 U2_1_3.3 U2_1_3.4 U2_1_3.5 U2_1_3.6 U2_1_3.7 U2_1_3.8 U2_1_4.1 U2_1_4.2 U2_1_4.3 U2_1_4.4 U2_1_4.5 U2_1_4.6 U2_1_4.7 U2_1_4.8 U2_1_5.1 U2_1_5.2 U2_1_5.3 U2_1_5.4 U2_1_5.5 U2_1_5.6 U2_1_5.7 U2_1_5.8 U2_1_6.1 U2_1_6.2 U2_1_6.3 U2_1_6.4 U2_1_6.5 U2_1_6.6 U2_1_6.7 U2_1_6.8 U2_1_7.1 U2_1_7.2 U2_1_7.3 U2_1_7.4 U2_1_7.5 U2_1_7.6 U2_1_7.7 U2_1_7.8 U2_1_8.1 U2_1_8.2 U2_1_8.3 U2_1_8.4 U2_1_8.5 U2_1_8.6 U2_1_8.7 U2_1_8.8 U2_2.1 U2_2.2 U2_2.3 U2_2.4 U2_2.5 U2_2.6 U2_2.7 U2_2.8 U2_2_1.1 U2_2_1.2 U2_2_1.3 U2_2_1.4 U2_2_1.5 U2_2_1.6 U2_2_1.7 U2_2_1.8 U2_2_2.1 U2_2_2.2 U2_2_2.3 U2_2_2.4 U2_2_2.5 U2_2_2.6 U2_2_2.7 U2_2_2.8 U2_2_3.1 U2_2_3.2 U2_2_3.3 U2_2_3.4 U2_2_3.5 U2_2_3.6 U2_2_3.7 U2_2_3.8 U2_2_4.1 U2_2_4.2 U2_2_4.3 U2_2_4.4 U2_2_4.5 U2_2_4.6 U2_2_4.7 U2_2_4.8 U2_2_5.1 U2_2_5.2 U2_2_5.3 U2_2_5.4 U2_2_5.5 U2_2_5.6 U2_2_5.7 U2_2_5.8 U2_2_6.1 U2_2_6.2 U2_2_6.3 U2_2_6.4 U2_2_6.5 U2_2_6.6 U2_2_6.7 U2_2_6.8 U2_2_7.1 U2_2_7.2 U2_2_7.3 U2_2_7.4 U2_2_7.5 U2_2_7.6 U2_2_7.7 U2_2_7.8 U2_2_8.1 U2_2_8.2 U2_2_8.3 U2_2_8.4 U2_2_8.5 U2_2_8.6 U2_2_8.7 U2_2_8.8 U2_3.1 U2_3.2 U2_3.3 U2_3.4 U2_3.5 U2_3.6 U2_3.7 U2_3.8 U2_3_1.1 U2_3_1.2 U2_3_1.3 U2_3_1.4 U2_3_1.5 U2_3_1.6 U2_3_1.7 U2_3_1.8 U2_3_2.1 U2_3_2.2 U2_3_2.3 U2_3_2.4 U2_3_2.5 U2_3_2.6 U2_3_2.7 U2_3_2.8 U2_3_3.1 U2_3_3.2 U2_3_3.3 U2_3_3.4 U2_3_3.5 U2_3_3.6 U2_3_3.7 U2_3_3.8 U2_3_4.1 U2_3_4.2 U2_3_4.3 U2_3_4.4 U2_3_4.5 U2_3_4.6 U2_3_4.7 U2_3_4.8 U2_3_5.1 U2_3_5.2 U2_3_5.3 U2_3_5.4 U2_3_5.5 U2_3_5.6 U2_3_5.7 U2_3_5.8 U2_3_6.1 U2_3_6.2 U2_3_6.3 U2_3_6.4 U2_3_6.5 U2_3_6.6 U2_3_6.7 U2_3_6.8 U2_3_7.1 U2_3_7.2 U2_3_7.3 U2_3_7.4 U2_3_7.5 U2_3_7.6 U2_3_7.7 U2_3_7.8 U2_3_8.1 U2_3_8.2 U2_3_8.3 U2_3_8.4 U2_3_8.5 U2_3_8.6 U2_3_8.7 U2_3_8.8 U2_4.1 U2_4.2 U2_4.3 U2_4.4 U2_4.5 U2_4.6 U2_4.7 U2_4.8 U2_4_1.1 U2_4_1.2 U2_4_1.3 U2_4_1.4 U2_4_1.5 U2_4_1.6 U2_4_1.7 U2_4_1.8 U2_4_2.1 U2_4_2.2 U2_4_2.3 U2_4_2.4 U2_4_2.5 U2_4_2.6 U2_4_2.7 U2_4_2.8 U2_4_3.1 U2_4_3.2 U2_4_3.3 U2_4_3.4 U2_4_3.5 U2_4_3.6 U2_4_3.7 U2_4_3.8 U2_4_4.1 U2_4_4.2 U2_4_4.3 U2_4_4.4 U2_4_4.5 U2_4_4.6 U2_4_4.7 U2_4_4.8 U2_4_5.1 U2_4_5.2 U2_4_5.3 U2_4_5.4 U2_4_5.5 U2_4_5.6 U2_4_5.7 U2_4_5.8 U2_4_6.1 U2_4_6.2 U2_4_6.3 U2_4_6.4 U2_4_6.5 U2_4_6.6 U2_4_6.7 U2_4_6.8 U2_4_7.1 U2_4_7.2 U2_4_7.3 U2_4_7.4 U2_4_7.5 U2_4_7.6 U2_4_7.7 U2_4_7.8 U2_4_8.1 U2_4_8.2 U2_4_8.3 U2_4_8.4 U2_4_8.5 U2_4_8.6 U2_4_8.7 U2_4_8.8 U2_5.1 U2_5.2 U2_5.3 U2_5.4 U2_5.5 U2_5.6 U2_5.7 U2_5.8 U2_6.1 U2_6.2 U2_6.3 U2_6.4 U2_6.5 U2_6.6 U2_6.7 U2_6.8 U2_7.1 U2_7.2 U2_7.3 U2_7.4 U2_7.5 U2_7.6 U2_7.7 U2_7.8 U2_8.1 U2_8.2 U2_8.3 U2_8.4 U2_8.5 U2_8.6 U2_8.7 U2_8.8 U2_9.1 U2_9.2 U2_9.3 U2_9.4 U2_9.5 U2_9.6 U2_9.7 U2_9.8 U2_10.1 U2_10.2 U2_10.3 U2_10.4 U2_10.5 U2_10.6 U2_10.7 U2_10.8 U2_11.1 U2_11.2 U2_11.3 U2_11.4 U2_11.5 U2_11.6 U2_11.7 U2_11.8 U2_12.1 U2_12.2 U2_12.3 U2_12.4 U2_12.5 U2_12.6 U2_12.7 U2_12.8 U3.1 U3.2 U3.3 U3.4 U3.5 U3.6 U3.7 U3.8 U3.9 U3.10 U3.11 U3.12 U3.13 U3.14 U3_1.1 U3_1.2 U3_1.3 U3_1.4 U3_1.5 U3_1.6 U3_1.7 U3_1.8 U3_1.9 U3_1.10 U3_1.11 U3_1.12 U3_1.13 U3_1.14 U3_1_1.1 U3_1_1.2 U3_1_1.3 U3_1_1.4 U3_1_1.5 U3_1_1.6 U3_1_1.7 U3_1_1.8 U3_1_1.9 U3_1_1.10 U3_1_1.11 U3_1_1.12 U3_1_1.13 U3_1_1.14 U3_1_2.1 U3_1_2.2 U3_1_2.3 U3_1_2.4 U3_1_2.5 U3_1_2.6 U3_1_2.7 U3_1_2.8 U3_1_2.9 U3_1_2.10 U3_1_2.11 U3_1_2.12 U3_1_2.13 U3_1_2.14 U3_1_3.1 U3_1_3.2 U3_1_3.3 U3_1_3.4 U3_1_3.5 U3_1_3.6 U3_1_3.7 U3_1_3.8 U3_1_3.9 U3_1_3.10 U3_1_3.11 U3_1_3.12 U3_1_3.13 U3_1_3.14 U3_1_4.1 U3_1_4.2 U3_1_4.3 U3_1_4.4 U3_1_4.5 U3_1_4.6 U3_1_4.7 U3_1_4.8 U3_1_4.9 U3_1_4.10 U3_1_4.11 U3_1_4.12 U3_1_4.13 U3_1_4.14 U3_2.1 U3_2.2 U3_2.3 U3_2.4 U3_2.5 U3_2.6 U3_2.7 U3_2.8 U3_2.9 U3_2.10 U3_2.11 U3_2.12 U3_2.13 U3_2.14 U3_2_1.1 U3_2_1.2 U3_2_1.3 U3_2_1.4 U3_2_1.5 U3_2_1.6 U3_2_1.7 U3_2_1.8 U3_2_1.9 U3_2_1.10 U3_2_1.11 U3_2_1.12 U3_2_1.13 U3_2_1.14 U3_2_2.1 U3_2_2.2 U3_2_2.3 U3_2_2.4 U3_2_2.5 U3_2_2.6 U3_2_2.7 U3_2_2.8 U3_2_2.9 U3_2_2.10 U3_2_2.11 U3_2_2.12 U3_2_2.13 U3_2_2.14 U3_2_3.1 U3_2_3.2 U3_2_3.3 U3_2_3.4 U3_2_3.5 U3_2_3.6 U3_2_3.7 U3_2_3.8 U3_2_3.9 U3_2_3.10 U3_2_3.11 U3_2_3.12 U3_2_3.13 U3_2_3.14 U3_2_4.1 U3_2_4.2 U3_2_4.3 U3_2_4.4 U3_2_4.5 U3_2_4.6 U3_2_4.7 U3_2_4.8 U3_2_4.9 U3_2_4.10 U3_2_4.11 U3_2_4.12 U3_2_4.13 U3_2_4.14 U3_3.1 U3_3.2 U3_3.3 U3_3.4 U3_3.5 U3_3.6 U3_3.7 U3_3.8 U3_3.9 U3_3.10 U3_3.11 U3_3.12 U3_3.13 U3_3.14 U3_3_1.1 U3_3_1.2 U3_3_1.3 U3_3_1.4 U3_3_1.5 U3_3_1.6 U3_3_1.7 U3_3_1.8 U3_3_1.9 U3_3_1.10 U3_3_1.11 U3_3_1.12 U3_3_1.13 U3_3_1.14 U3_3_2.1 U3_3_2.2 U3_3_2.3 U3_3_2.4 U3_3_2.5 U3_3_2.6 U3_3_2.7 U3_3_2.8 U3_3_2.9 U3_3_2.10 U3_3_2.11 U3_3_2.12 U3_3_2.13 U3_3_2.14 U3_3_3.1 U3_3_3.2 U3_3_3.3 U3_3_3.4 U3_3_3.5 U3_3_3.6 U3_3_3.7 U3_3_3.8 U3_3_3.9 U3_3_3.10 U3_3_3.11 U3_3_3.12 U3_3_3.13 U3_3_3.14 U3_3_4.1 U3_3_4.2 U3_3_4.3 U3_3_4.4 U3_3_4.5 U3_3_4.6 U3_3_4.7 U3_3_4.8 U3_3_4.9 U3_3_4.10 U3_3_4.11 U3_3_4.12 U3_3_4.13 U3_3_4.14 U3_4.1 U3_4.2 U3_4.3 U3_4.4 U3_4.5 U3_4.6 U3_4.7 U3_4.8 U3_4.9 U3_4.10 U3_4.11 U3_4.12 U3_4.13 U3_4.14 U3_4_1.1 U3_4_1.2 U3_4_1.3 U3_4_1.4 U3_4_1.5 U3_4_1.6 U3_4_1.7 U3_4_1.8 U3_4_1.9 U3_4_1.10 U3_4_1.11 U3_4_1.12 U3_4_1.13 U3_4_1.14 U3_4_2.1 U3_4_2.2 U3_4_2.3 U3_4_2.4 U3_4_2.5 U3_4_2.6 U3_4_2.7 U3_4_2.8 U3_4_2.9 U3_4_2.10 U3_4_2.11 U3_4_2.12 U3_4_2.13 U3_4_2.14 U3_4_3.1 U3_4_3.2 U3_4_3.3 U3_4_3.4 U3_4_3.5 U3_4_3.6 U3_4_3.7 U3_4_3.8 U3_4_3.9 U3_4_3.10 U3_4_3.11 U3_4_3.12 U3_4_3.13 U3_4_3.14 U3_4_4.1 U3_4_4.2 U3_4_4.3 U3_4_4.4 U3_4_4.5 U3_4_4.6 U3_4_4.7 U3_4_4.8 U3_4_4.9 U3_4_4.10 U3_4_4.11 U3_4_4.12 U3_4_4.13 U3_4_4.14 U3_5.1 U3_5.2 U3_5.3 U3_5.4 U3_5.5 U3_5.6 U3_5.7 U3_5.8 U3_5.9 U3_5.10 U3_5.11 U3_5.12 U3_5.13 U3_5.14 U3_6.1 U3_6.2 U3_6.3 U3_6.4 U3_6.5 U3_6.6 U3_6.7 U3_6.8 U3_6.9 U3_6.10 U3_6.11 U3_6.12 U3_6.13 U3_6.14 U3_7.1 U3_7.2 U3_7.3 U3_7.4 U3_7.5 U3_7.6 U3_7.7 U3_7.8 U3_7.9 U3_7.10 U3_7.11 U3_7.12 U3_7.13 U3_7.14 U3_8.1 U3_8.2 U3_8.3 U3_8.4 U3_8.5 U3_8.6 U3_8.7 U3_8.8 U3_8.9 U3_8.10 U3_8.11 U3_8.12 U3_8.13 U3_8.14